# Altium PCB KEY.PcbDoc
Units mil, origin at the board's own origin, x right, y up, seen from the top; angles counter-clockwise.
Board outline 3712.2 x 2269.69 mil, 2 copper layers (Top Layer, Bottom Layer); 20 components, 15 nets, 79 pads, 9 vias.
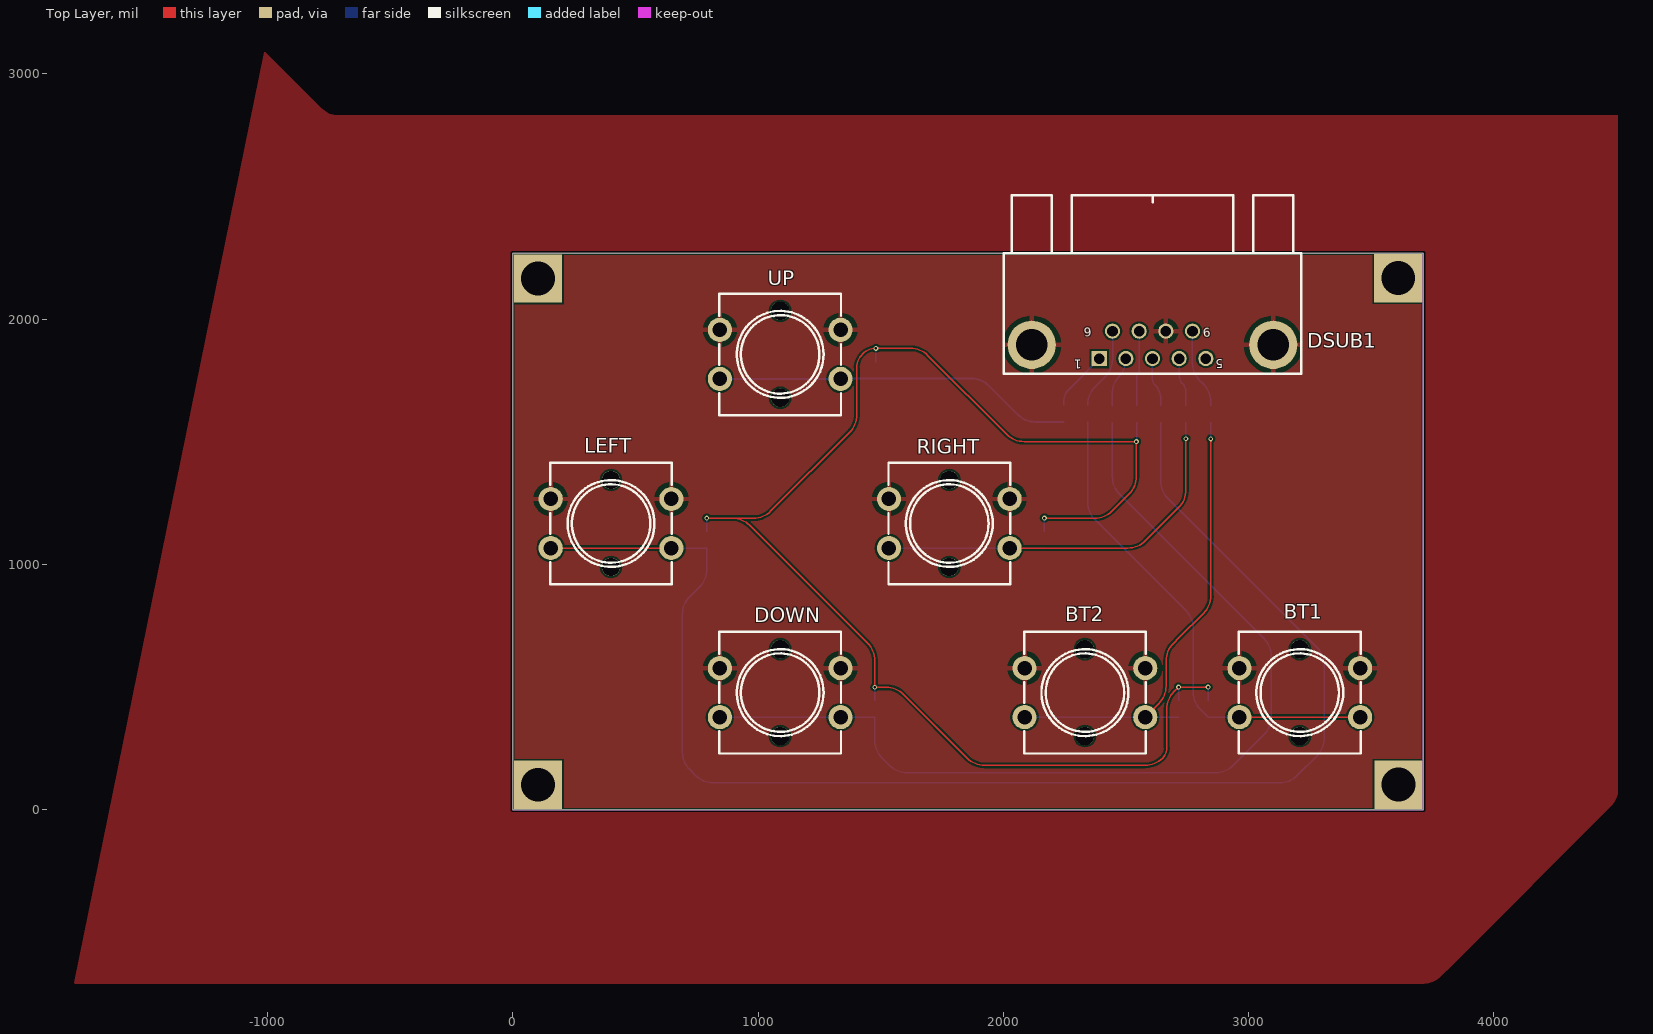
[diagram p0: Top Layer view]
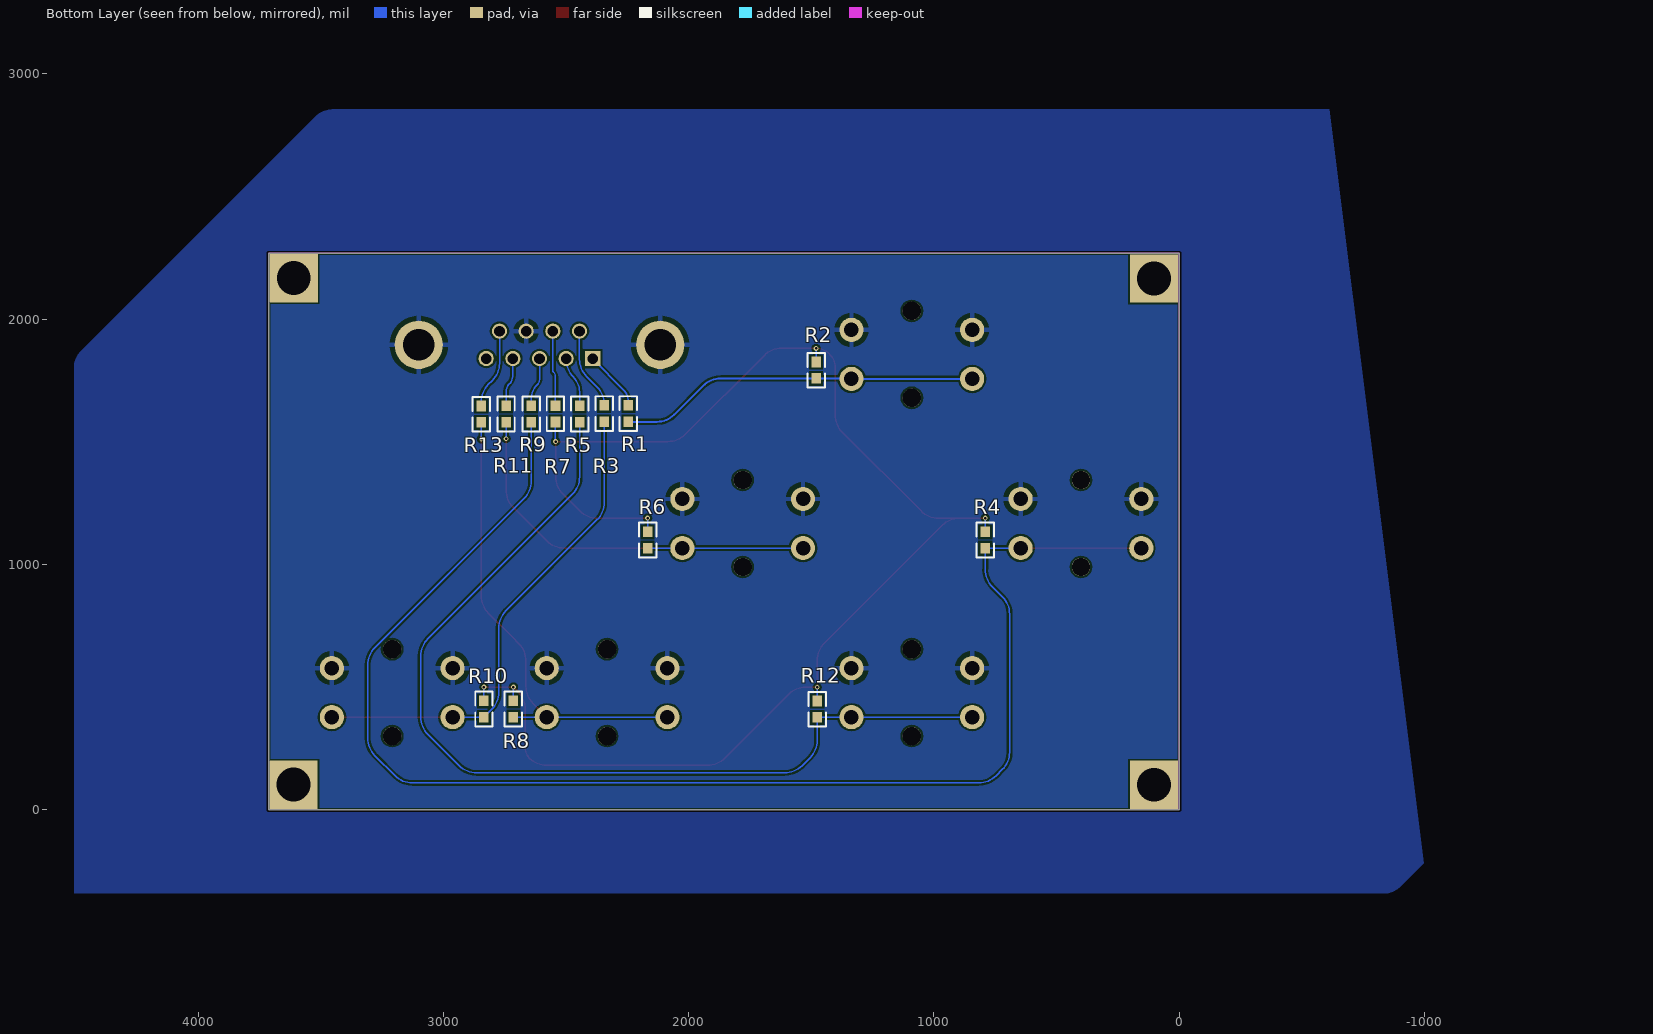
[diagram p1: Bottom Layer view, seen from below]

## Layer stack, top to bottom
Top Solder: solder mask 0.4, Solder Resist, Dk 3.5
Top Layer: signal copper 1.4
Dielectric1: dielectric 12.6, FR-4, Dk 4.8
Bottom Layer: signal copper 1.4
Bottom Solder: solder mask 0.4, Solder Resist, Dk 3.5

## Board outline
0,0 0,2269.69 3712.2,2269.69 3712.2,0

## Design rules (kind name [scope] priority, off if disabled: settings)
Clearance footprint [(HasFootprint('LQFP-32_L7.0-W7.0-P0.80-LS9.0-TL') OR HasFootprint('TF1') OR HasFootprint('LQFP64-10-05') OR HasFootprint('USB-C-16PIN'))] p1: gap=5
Clearance [All] p2: gap=8
ComponentClearance [All] p1: gap=0 collisioncheckmode=3 verticalgap=0 showdistances=FALSE
DiffPairsRouting [All] p1: maxlimit=10 minlimit=10 mostfreqgap=10 toplayer_minwidth=7 toplayer_maxwidth=15 toplayer_prefwidth=7 bottomlayer_minwidth=7 bottomlayer_maxwidth=15 bottomlayer_prefwidth=7 maxuncoupledlength=500
FabricationTestPointUsage TestPointUsage [All] p1: valid=0 allowmultiple=FALSE
FabricationTestpoint Testpoint [All] p1: side=3 testpointundercomponent=TRUE minsize=40 maxsize=100 preferedsize=60 minholesize=0 maxholesize=40 preferedholesize=32 testpointgrid=1 allowsidetop=TRUE allowsidebottom=TRUE usegrid=TRUE gridtolerance=0.01
HoleSize [All] p1: absolutevalues=TRUE maxlimit=157.48 minlimit=10 maxpercent=80.000 minpercent=20.000
PlaneClearance [All] p1: clearance=5
PlaneConnect [All] p1: planeconnectstyle=Relief reliefexpansion=3 reliefentries=4 reliefconductorwidth=20 reliefairgap=2
PolygonConnect [All] p1: connectstyle=Relief reliefconductorwidth=20 reliefentries=4 polygonreliefangle="90 Angle" airgapwidth=20
RoutingVias [All] p1: holewidth=11.81 width=23.62 viastyle="Through Hole" minholewidth=12 minwidth=24 maxholewidth=39.37 maxwidth=78.74
SilkToSilkClearance [All] p1: silktosilkclearance=0
SilkToSolderMaskClearance [IsPad] p1: minsilkscreentomaskgap=0 clearancetoexposedcopper=TRUE
SolderMaskExpansion [All] p1: expansion=4
Width [All] p1: maxlimit=118.11 minlimit=6 preferedwidth=8
21 further rules are at their usual default settings.

## Components (designator, comment, footprint, x,y, rotation, side; value= is the part's Value field where it differs from the comment)
BT1 "B3W-4055-BY-OMZ" SW-TH_4P-L12.0-W12.0-P5.00-LS12.5-EH 3208.18,477.6 r0 top (schematic designator SW5)
BT2 "B3W-4055-BY-OMZ" SW-TH_4P-L12.0-W12.0-P5.00-LS12.5-EH 2332.2,477.6 r0 top (schematic designator SW4)
DOWN "B3W-4055-BY-OMZ" SW-TH_4P-L12.0-W12.0-P5.00-LS12.5-EH 1089.79,477.6 r0 top (schematic designator SW6)
DSUB1 "DMR-9S" DSUB-TH_DMR-9S 2607.73,1895.45 r90 top
LEFT "B3W-4055-BY-OMZ" SW-TH_4P-L12.0-W12.0-P5.00-LS12.5-EH 400.19,1167.19 r0 top (schematic designator SW2)
R1 "0603" 0603 2245.37,1648.66 r270 bottom
R2 "0603" 0603 1480.01,1825.62 r270 bottom
R3 "0603" 0603 2344.16,1648.66 r270 bottom
R4 "0603" 0603 790.35,1133.28 r270 bottom
R5 "0603" 0603 2444.26,1647.35 r270 bottom
R6 "0603" 0603 2166.98,1133.28 r270 bottom
R7 "0603" 0603 2542.61,1647.79 r270 bottom
R8 "0603" 0603 2714.24,444.59 r270 bottom
R9 "0603" 0603 2641.83,1646.92 r270 bottom
R10 "0603" 0603 2834.35,444.06 r270 bottom
R11 "0603" 0603 2743.96,1646.84 r270 bottom
R12 "0603" 0603 1475.51,443.64 r270 bottom
R13 "0603" 0603 2845.1,1646.3 r270 bottom
RIGHT "B3W-4055-BY-OMZ" SW-TH_4P-L12.0-W12.0-P5.00-LS12.5-EH 1779.38,1167.19 r0 top (schematic designator SW3)
UP "B3W-4055-BY-OMZ" SW-TH_4P-L12.0-W12.0-P5.00-LS12.5-EH 1089.79,1856.78 r0 top (schematic designator SW1)

## Footprints (in the part's own frame and the unit in brackets; to place one, negate y for a bottom-side part, rotate by r counter-clockwise, add the part's x,y. Pads: shape width x height; smd on the part's side, far side on the other; paste and mask are expansions set on the pad)
0603 [mm]
  rect 1.1x1 smd: 1(0,0) 2(1.7,0)
  silkscreen extent -0.95,-0.9 2.65,0.9
DSUB-TH_DMR-9S [mil]
  rect 62x62 hole 43.31: 1(-55.9,217.31)
  round 62 hole 43.31: 2(-55.9,108.65) 3(-55.9,-0.01) 4(-55.9,-108.67) 5(-55.9,-217.33) 6(55.91,162.98) 7(55.91,54.32) 8(55.91,-54.34) 9(55.91,-163)
  round 196.85 hole 127.95: 10(0,492.12) 11(0,-492.12)
  silkscreen extent -118,-606 610,606
SW-TH_4P-L12.0-W12.0-P5.00-LS12.5-EH [mm]
  round 2.5 hole 1.5: 1(6.25,-2.54) 2(-6.25,-2.54) 3(6.25,2.54) 4(-6.25,2.54)
  round 1.9 hole 1.9 unplated: ""(0,-4.5) ""(0,4.5)
  silkscreen extent -6.3,-6.3 6.3,6.3

## Part data
R1 R2 R3 R4 R5 R6 R7 R8 R9 R10 R11 R12 R13: library part RES_0603, "0603 footprint resistor"

## Free pads (board coordinates)
  round 2.36 on Mech5: 1(2626.29,224.57) 1(2628.65,224.57)
  rect 196.85x196.85 hole 137.8: HOLE2(102.37,102.23) HOLE2(102.75,2166.43) HOLE2(3609.77,2167.65) HOLE2(3610.91,102.58)

## Via types
v1: diameter 20, hole 10, Top Layer to Bottom Layer, 9 vias

## Nets (pads, with @x,y where several pads share a name; then routed paths per layer and width w, separated by ;. In a path a pad name is that pad's centre, name@x,y a point inside that pad or via, vN(x,y) a via of type N, cw(c..) or ccw(c..) an arc to the next point about the centre after c; other vN are vias at no path point)
GND: BT1.3 BT1.4 BT2.3 BT2.4 DOWN.3 DOWN.4 DSUB1.8 DSUB1.10 DSUB1.11 LEFT.3 LEFT.4 RIGHT.3 RIGHT.4 UP.3 UP.4
JOY1_BTN1: BT1.1 BT1.2 R3.2 R10.2 | length 2014.7
  Top Layer w6: BT1.2 BT1.1
  Bottom Layer w6: R3.2 2344.16,1252.96 ccw(c2444.16,1252.96) 2373.45,1182.25 2744.9,810.8 cw(c2674.19,740.09) 2774.19,740.09 2774.19,478.71 ccw(c2874.19,478.71) 2803.48,408 R10.2 2960.99,377.13 ccw(c2960.99,378.73) BT1.2
JOY1_BTN2: BT2.1 BT2.2 R8.2 R13.2 | length 1928.9
  Top Layer w6: BT2.1 2633.61,432.95 ccw(c2562.9,503.66) 2662.9,503.66 2662.9,607.06 cw(c2762.9,607.06) 2692.19,677.77 2717.39,702.97 2815.81,801.39 ccw(c2745.1,872.1) 2845.1,872.1 v1(2845.1,1512.27)
  Bottom Layer w6: BT2.2 BT2.1 2578.33,377.67 R8.2 ; v1@2844.57,1511 ccw(c2843.3,1512.27) v1(2845.1,1512.27) R13.2
JOY1_DOWN: DOWN.1 DOWN.2 R5.2 R12.2 | length 3984
  Bottom Layer w6: DOWN.2 DOWN.1 1473.38,377.6 cw(c1473.38,374.58) R12.2 1475.51,283.49 ccw(c1575.51,283.49) 1504.8,212.78 1537.36,180.22 ccw(c1608.07,250.94) 1608.07,150.94 2864.7,150.94 ccw(c2864.7,250.94) 2935.41,180.22 3062.7,307.52 ccw(c2991.99,378.23) 3091.99,378.23 3091.99,626.51 ccw(c2991.99,626.51) 3062.7,697.22 2473.55,1286.38 cw(c2544.26,1357.09) 2444.26,1357.09 R5.2
JOY1_LEFT: LEFT.1 LEFT.2 R4.2 R9.2 | length 5831.6
  Top Layer w6: LEFT.2 LEFT.1
  Bottom Layer w6: LEFT.1 ccw(c648.28,1069.22) 648.28,1066.35 R4.2 790.35,979.89 cw(c690.35,979.89) 761.06,909.18 720.38,868.5 ccw(c791.09,797.79) 691.09,797.79 691.09,235.19 ccw(c791.09,235.19) 720.38,164.48 745.87,138.99 ccw(c816.58,209.7) 816.58,109.7 3126.06,109.7 ccw(c3126.06,209.7) 3196.77,138.99 3279.02,221.24 ccw(c3208.31,291.95) 3308.31,291.95 3308.31,590.33 ccw(c3208.31,590.33) 3279.02,661.04 2671.12,1268.94 cw(c2741.83,1339.65) 2641.83,1339.65 R9.2
JOY1_RIGHT: R6.2 R11.2 RIGHT.1 RIGHT.2 | length 1743.5
  Top Layer w6: RIGHT.1 2507.71,1067.19 ccw(c2507.71,1167.19) 2578.42,1096.48 2714.67,1232.72 ccw(c2643.96,1303.43) 2743.96,1303.43 v1(2743.96,1512.89)
  Bottom Layer w6: RIGHT.2 RIGHT.1 ccw(c2027.47,1069.22) 2027.47,1066.35 R6.2 ; v1@2743.53,1511.86 ccw(c2742.51,1512.89) v1(2743.96,1512.89) R11.2
JOY1_UP: R1.2 R2.2 UP.1 UP.2 | length 1466.8
  Bottom Layer w8: UP.2 UP.1 cw(c1340.45,1752.18) 1340.45,1758.69 R2.2 1869.48,1758.69 cw(c1869.48,1658.69) 1940.19,1729.4 2058.58,1611.02 ccw(c2129.29,1681.73) 2129.29,1581.73 R1.2
NetDSUB1_1: DSUB1.1 R1.1 | length 247.8
  Bottom Layer w6: R1.1 2245.37,1663.56 cw(c2315.48,1663.56) 2265.91,1713.13 2389.07,1836.29 ccw(c2385.82,1839.55) DSUB1.1
NetDSUB1_2: DSUB1.2 R5.1 | length 206.9
  Bottom Layer w6: R5.1 2444.26,1703.5 cw(c2531.43,1703.5) 2469.79,1765.14 ccw(c2399.08,1835.85) 2499.08,1835.85 DSUB1.2
NetDSUB1_3: DSUB1.3 R9.1 | length 201.7
  Bottom Layer w6: DSUB1.3 2607.74,1753.86 ccw(c2636.06,1753.86) 2616.03,1733.83 cw(c2553.75,1671.55) 2641.83,1671.55 R9.1
NetDSUB1_4: DSUB1.4 R11.1 | length 200.1
  Bottom Layer w6: DSUB1.4 2716.4,1772.89 ccw(c2770.74,1772.89) 2732.32,1734.46 cw(c2704.21,1706.35) 2743.96,1706.35 R11.1
NetDSUB1_6: DSUB1.6 R3.1 | length 335.8
  Bottom Layer w6: R3.1 2344.16,1653.73 cw(c2444.16,1653.73) 2373.45,1724.44 2415.46,1766.45 ccw(c2344.75,1837.16) 2444.75,1837.16 DSUB1.6
NetDSUB1_7: DSUB1.7 R7.1 | length 306.5
  Bottom Layer w6: R7.1 2542.61,1764.18 cw(c2571.31,1764.18) 2551.02,1784.47 ccw(c2545.24,1790.25) 2553.41,1790.25 DSUB1.7
NetDSUB1_9: DSUB1.9 R13.1 | length 327.3
  Bottom Layer w6: DSUB1.9 2770.73,1820.62 ccw(c2870.73,1820.62) 2800.02,1749.9 2815.81,1734.11 cw(c2745.1,1663.4) 2845.1,1663.4 R13.1
VCC3V3: R2.1 R4.1 R6.1 R7.2 R8.1 R10.1 R12.1 | length 6024.9
  Top Layer w6: v1(790.35,1189.07) 894.91,1189.07 ; v1(2166.98,1189.07) 2372.41,1189.07 ccw(c2372.41,1289.07) 2443.12,1218.36 2512.75,1287.99 ccw(c2442.04,1358.7) 2542.04,1358.7 v1(2542.04,1501.14) 2084.19,1501.14 cw(c2084.19,1601.14) 2013.48,1530.43 1691.8,1852.12 ccw(c1621.09,1781.41) 1621.09,1881.41 v1(1480.01,1881.41) ccw(c1480.01,1804.49) 1425.62,1858.88 ccw(c1482.72,1801.78) 1401.97,1801.78 1401.97,1609.73 cw(c1301.97,1609.73) 1372.68,1539.02 1052.01,1218.36 cw(c981.3,1289.07) 981.3,1189.07 894.91,1189.07 ; v1(2834.35,499.84) ccw(c2833.05,498.54) 2833.05,500.38 v1(2714.24,500.38) 2695.09,481.24 ccw(c2765.8,410.53) 2665.8,410.53 2665.8,252.39 cw(c2606.79,252.39) 2648.52,210.66 cw(c2577.81,281.37) 2577.81,181.37 1922.61,181.37 cw(c1922.61,281.37) 1851.9,210.66 1592.42,470.14 ccw(c1521.71,399.43) 1521.71,499.43 v1(1475.51,499.43) 1475.51,608.46 ccw(c1375.51,608.46) 1446.22,679.17 965.62,1159.78 ccw(c894.91,1089.07) 894.91,1189.07
  Bottom Layer w6: R4.1 v1(790.35,1189.07) ; R12.1 v1(1475.51,499.43) ; R2.1 v1(1480.01,1881.41) ; R6.1 v1(2166.98,1189.07) ; v1@2542.61,1502.52 R7.2 ; R8.1 v1(2714.24,500.38) ; R10.1 v1(2834.35,499.84)
pads on no net: BT1. BT2. DOWN. DSUB1.5 LEFT. RIGHT. UP.

## Polygon pours and split planes (outlines as drawn)
GND on Bottom Layer "Bottom Layer-No Net" (solid, pour order 88): -612.57,2855.9 3450.14,2855.9 cw(c3450.14,2755.9) 3520.85,2826.61 4341.82,2005.64 4476.04,1871.41 cw(c4405.33,1800.7) 4505.33,1800.7 4505.33,-340.75 -832.77,-340.75 cw(c-832.77,-240.75) -903.48,-311.46 -996.82,-218.12
GND on Top Layer "Bottom Layer-No Net" (solid, pour order 90): -1013.17,3092.99 -780.84,2860.66 ccw(c-710.13,2931.37) -710.13,2831.37 4505.33,2831.37 4505.33,84.92 cw(c4405.33,84.92) 4476.04,14.21 3834.93,-626.89 3782.47,-679.36 cw(c3711.76,-608.65) 3711.76,-708.65 -1789.85,-708.65

## Keep-outs
Keep-Out Layer:
  the board outline again, w0.5

## Silkscreen, mask and mechanical layers (free items; w line width, h text height)
Mechanical 4:
  lines w0.5: 977.31,215.76 2199.91,215.76 ; 2036.93,224.56 2627.47,224.56 2627.47,730.63 2036.93,730.63
Mechanical 5:
  lines w2.36: 2626.29,224.57 ccw(c2627.47,224.57) 2628.65,224.57 ccw(c2627.47,224.57) 2626.29,224.57

## Text inside footprints (layer, text, board x,y; h text height)
DSUB1: Top Overlay "6" at 2358.17,1968 h35 r185; Top Overlay "9" at 2843.57,1965.93 h35 r185; Top Overlay "5" at 2895.18,1836.9 h35 r180; Top Overlay "1" at 2318.42,1835.05 h35 r180